# Altium PCB Profiling.PcbDoc
Units mm, origin at the board's own origin, x right, y up, seen from the top; angles counter-clockwise.
Board outline 99.06 x 93.22 mm, 2 copper layers (Top Layer, Bottom Layer); 73 components, 0 nets, 296 pads, 58 vias.
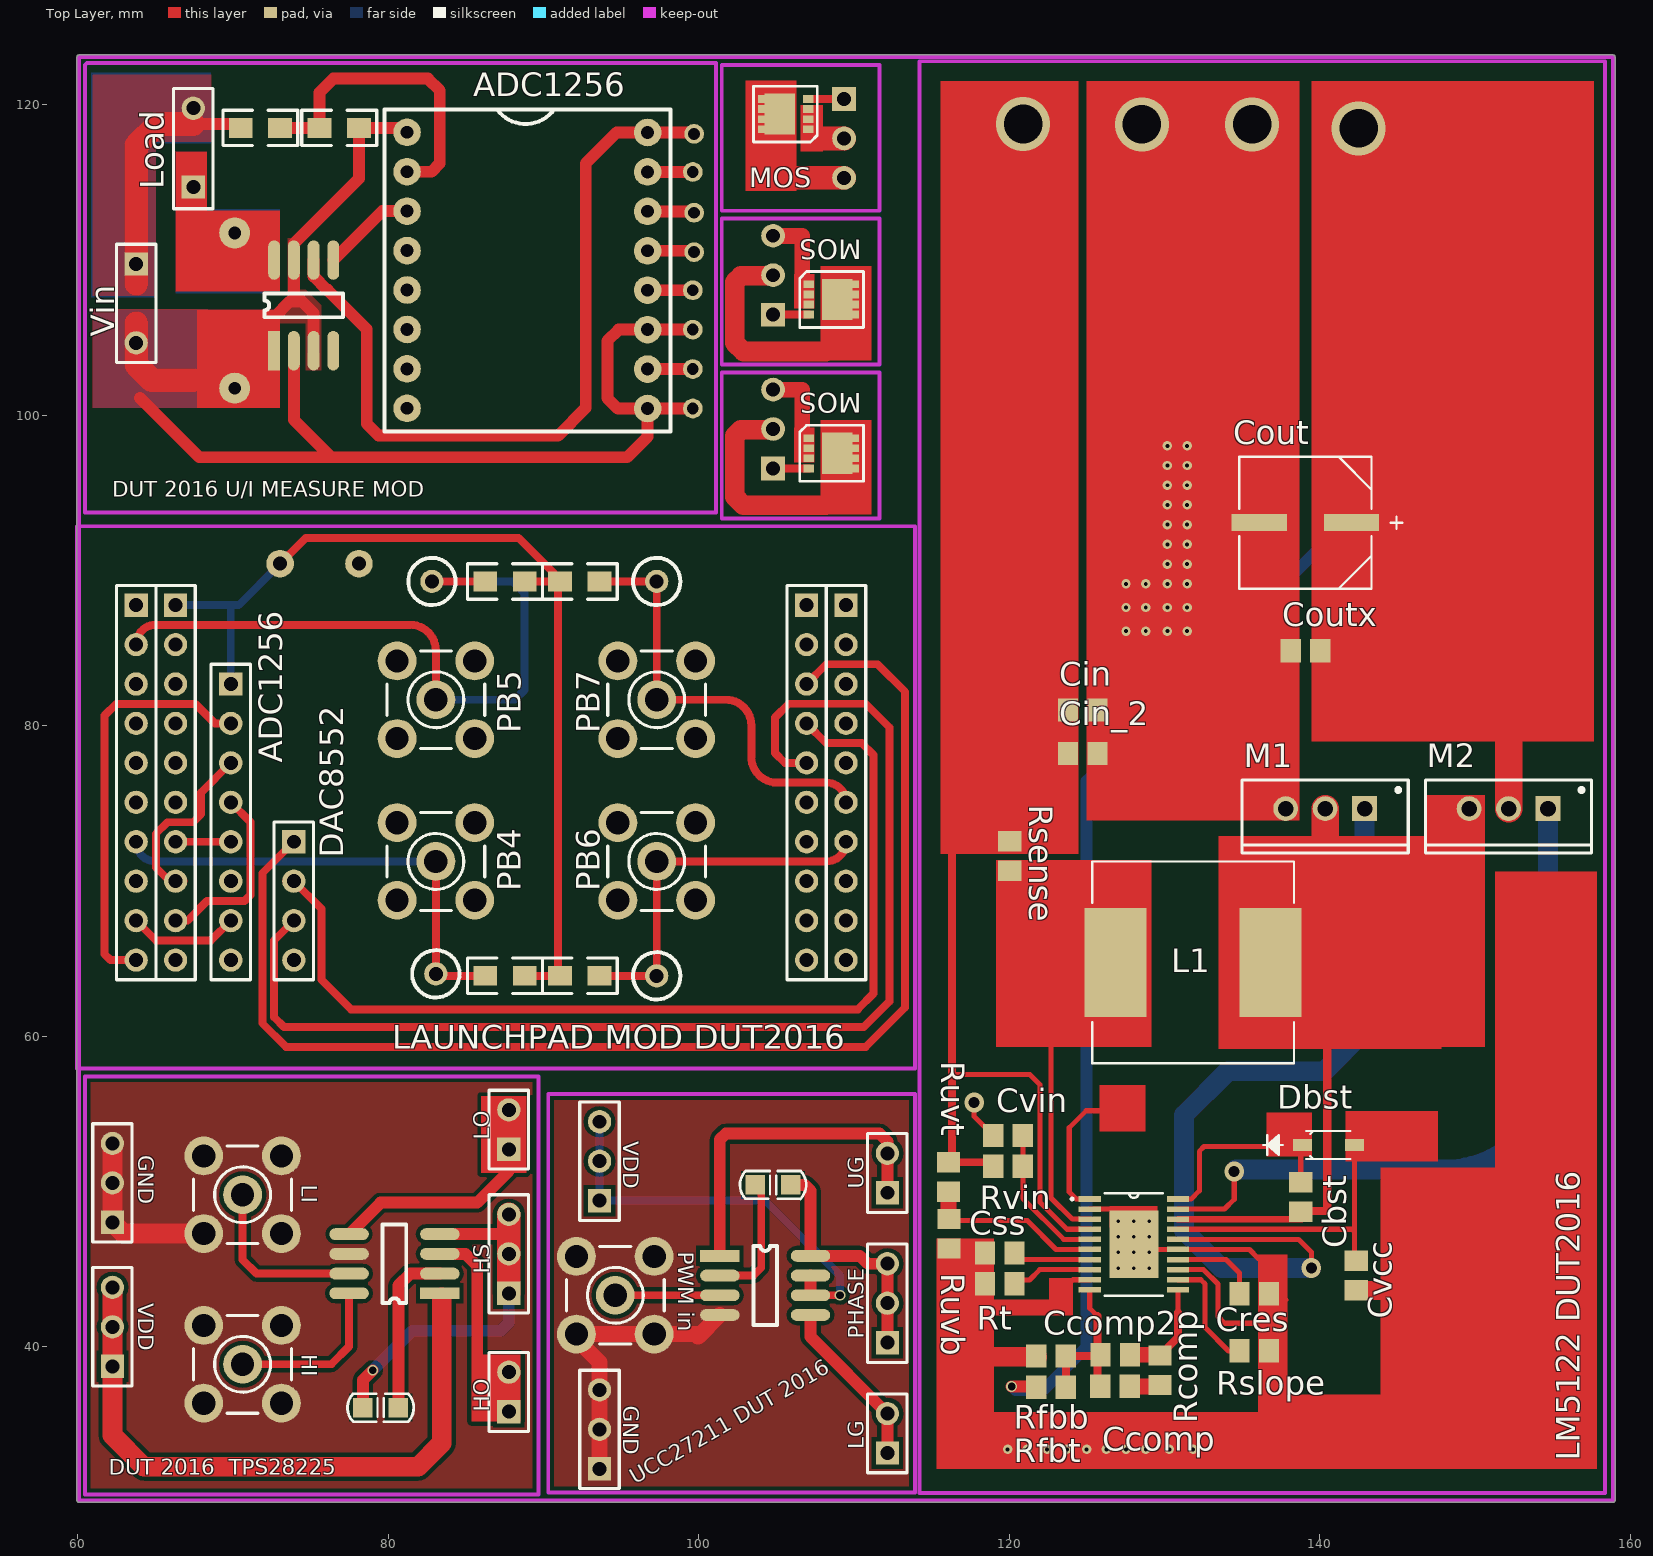
[diagram p0: Top Layer view]
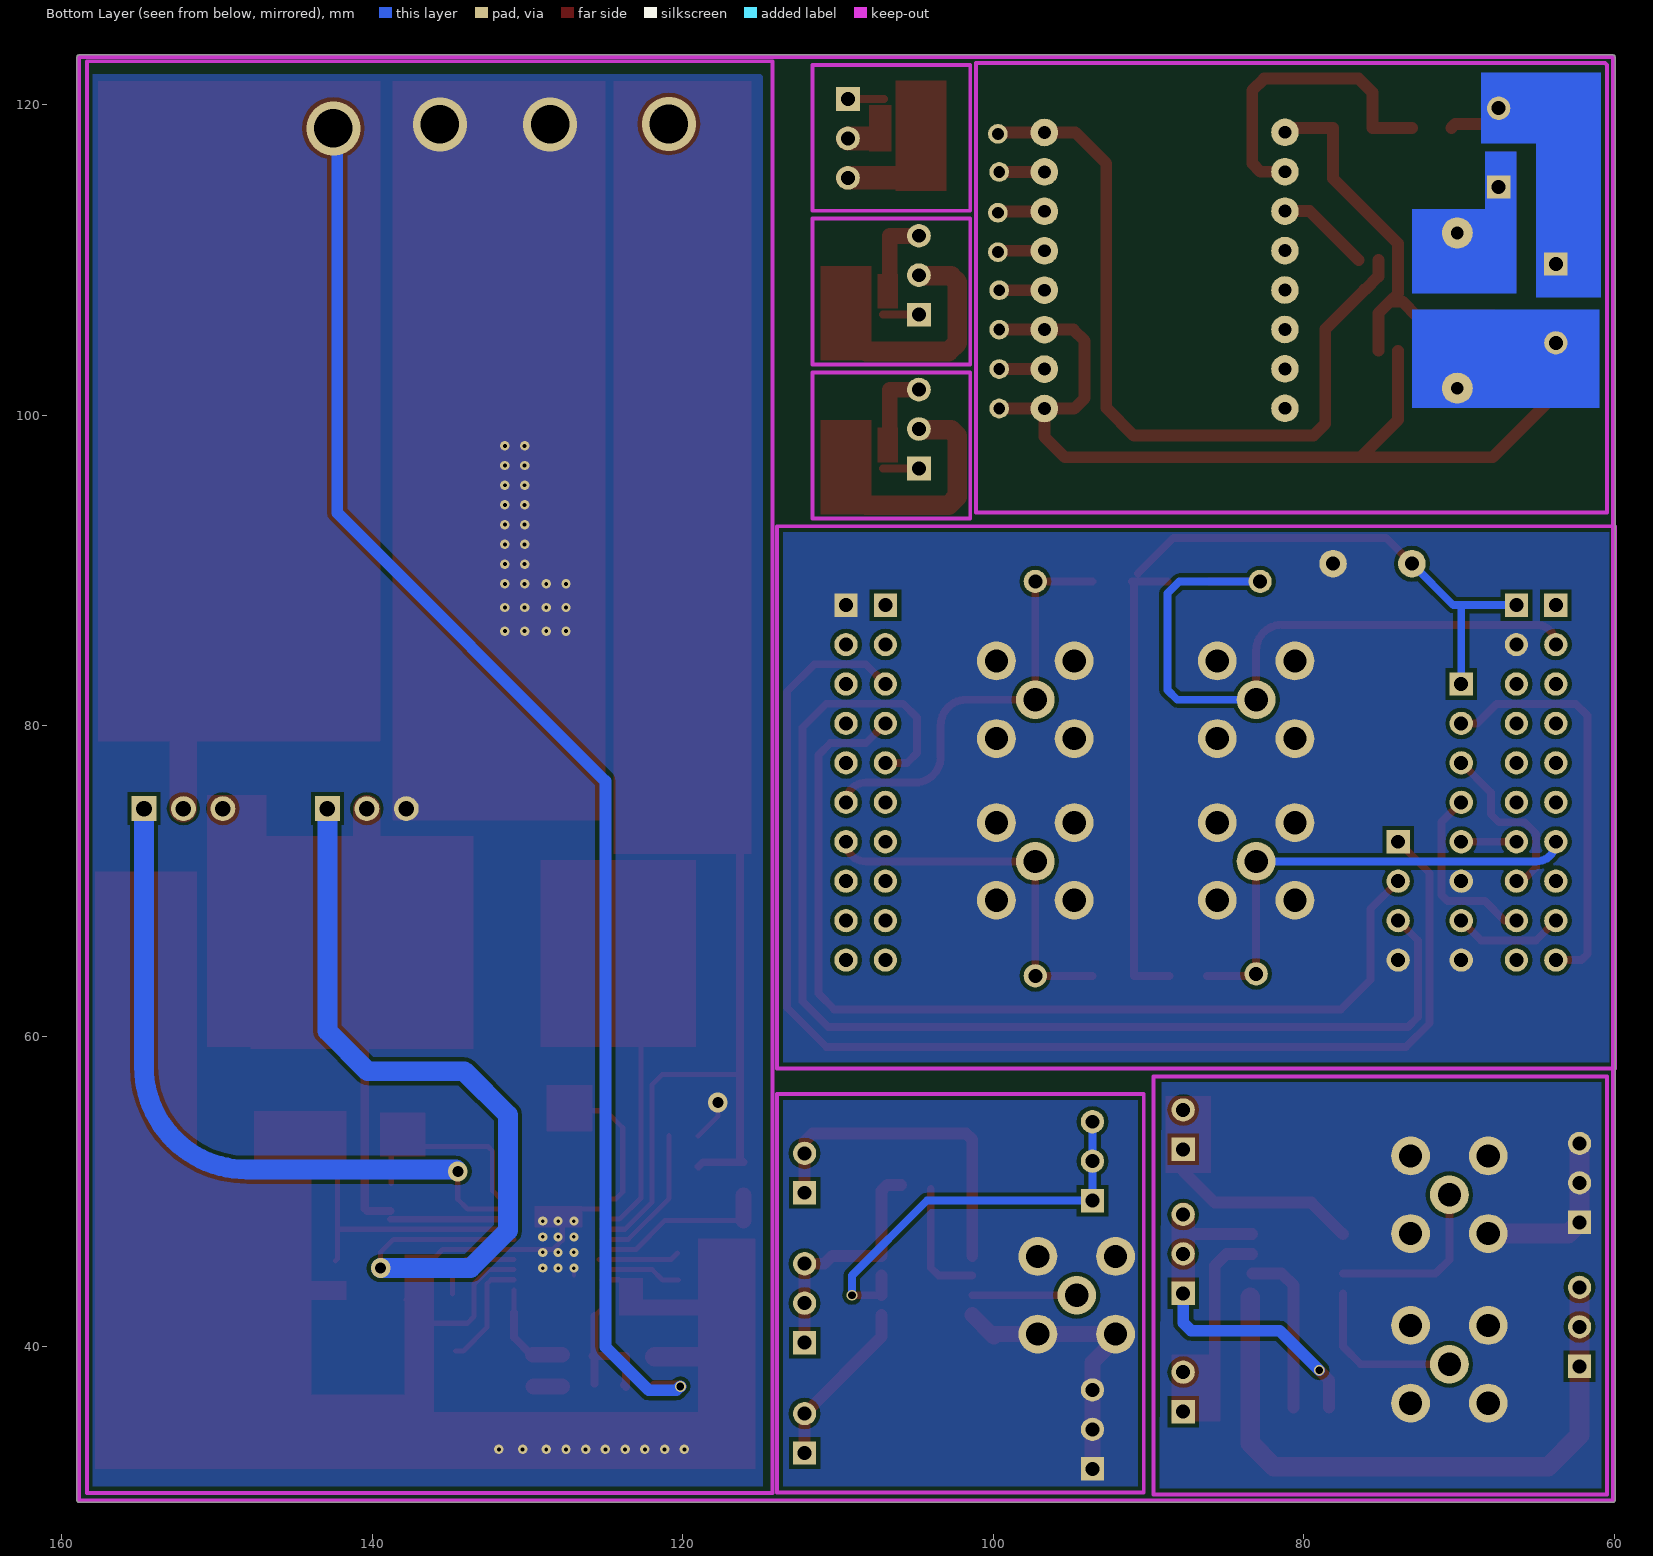
[diagram p1: Bottom Layer view, seen from below]

## Layer stack, top to bottom
Top Solder: solder mask 0.0102, Solder Resist, Dk 3.5
Top Layer: signal copper 0.0356
Dielectric 1: dielectric 0.32, FR-4, Dk 4.8
Bottom Layer: signal copper 0.0356
Bottom Solder: solder mask 0.0102, Solder Resist, Dk 3.5

## Board outline
59.944,30.099 ccw(c60.071,30.099) 60.071,29.972 158.877,29.972 ccw(c158.877,30.099) 159.004,30.099 159.004,123.063 ccw(c158.877,123.063) 158.877,123.19 60.071,123.19 ccw(c60.071,123.063) 59.944,123.063

## Design rules (kind name [scope] priority, off if disabled: settings)
Clearance [All] p1: gap=0.254
PolygonConnect [All] p1: connectstyle=Relief reliefconductorwidth=0.254 reliefentries=4 polygonreliefangle="90 Angle" airgapwidth=0.254
RoutingVias [All] p1: holewidth=0.711 width=1.27 viastyle="Through Hole" minholewidth=0.711 minwidth=1.27 maxholewidth=0.711 maxwidth=1.27
SolderMaskExpansion [All] p1: expansion=0.102
Width [All] p1: maxlimit=100 minlimit=0.254 preferedwidth=0.254 minimp=50.000000 maximp=50.000000 favimp=50.000000
30 further rules are at their usual default settings.

## Components (designator, comment, footprint, x,y, rotation, side; value= is the part's Value field where it differs from the comment)
ADC1256 "ADS1256_Dream" ADS1256_Dream 88.9,109.22 r0 top (schematic designator P1)
C1 "CAP" 0805c 104.775,50.419 r0 top
C1 "CAP" 0805c 79.502,36.068 r180 top
Cbst "Cap" 0805-2 138.76,49.632 r270 top
Ccomp "Cap" 0805-2 126.797,37.44 r180 top
Ccomp2 "Cap" 0805-2 126.822,39.472 r180 top
Cin "Cap" 0805-2 124.714,81.001 r180 top
Cin_2 "Cap" 0805-2 124.714,78.207 r180 top
Cout "35SVPF82M" CAPSMT_62_E12 139.065,93.066 r180 top
Coutx "Cap" 0805-2 139.065,84.811 r0 top
Cres "Cap" 0805-2 135.763,43.409 r180 top
Css "Cap" 0805-2 119.38,46.025 r0 top
Cvcc "Cap" 0805-2 142.342,44.577 r90 top
Cvin "Cap" 0805-2 119.913,53.594 r0 top
Dbst "MBR130T1G" SOD-123 140.538,52.984 r0 top
GND "CON3" HDR1X3 93.599,32.131 r90 top (schematic designator J4)
GND "CON3" HDR1X3 62.23,48.006 r90 top
HI "SMB" SMB_V-RJ45 70.612,38.862 r0 top
HO "CON2" HDR1X2#1 87.757,35.814 r90 top
HS "CON3" HDR1X3 87.757,43.434 r90 top
J1 "CON10" HDR1X10 63.754,87.757 r270 top
J2 "CON10" HDR1X10 66.294,87.757 r270 top
J3 "CON10" HDR1X10 106.934,87.757 r270 top
J4 "CON10" HDR1X10 109.474,87.757 r270 top
J5 "CHECK" CHECK-A 83.058,64.008 r0 top
J5 "CHECK" CHECK-A 97.282,63.881 r0 top
J6 "CHECK" CHECK-A 82.804,89.281 r0 top
J6 "CHECK" CHECK-A 97.282,89.281 r0 top
J9 "CON8" HDR1X8 69.85,82.677 r270 top
J? "CON4" HDR1X4 73.914,72.517 r270 top
L1 "SRR1208-330YL" SRR1208 131.826,64.745 r0 top
LG "CON2" HDR1X2#1 112.141,33.147 r90 top (schematic designator J3)
LI "SMB" SMB_V-RJ45 70.612,49.784 r0 top
LO "CON2" HDR1X2#1 87.757,52.705 r90 top
Load "power" HDR1X2#2 67.437,117.221 r90 top
M1 "NMOS-2" TO-220AB 140.335,74.651 r180 top
M2 "NMOS-2" TO-220AB 152.146,74.651 r180 top
MOS "Comment" TRANS_NexFET_Q3A 108.712,97.536 r0 top (schematic designator M2)
MOS "Comment" TRANS_NexFET_Q3A 108.712,107.442 r0 top (schematic designator M2)
MOS "Comment" TRANS_NexFET_Q3A 105.41,119.38 r180 top (schematic designator M2)
P7 "SMB" SMB_V-RJ45 83.058,71.247 r0 top
P7 "SMB" SMB_V-RJ45 97.282,71.247 r0 top
P8 "SMB" SMB_V-RJ45 83.058,81.661 r0 top
P8 "SMB" SMB_V-RJ45 97.282,81.661 r0 top
PHASE "CON3" HDR1X3 112.141,40.259 r90 top (schematic designator J2)
"PWM in" "SMB" SMB_V-RJ45 94.615,43.307 r0 top (schematic designator P1)
R1 "RES" 0805r 72.898,118.491 r180 top
R1 "RES" 0805r 86.36,63.881 r0 top
R1 "RES" 0805r 93.472,63.881 r180 top
R2 "RES" 0805r 77.978,118.491 r180 top
R2 "RES" 0805r 86.36,89.281 r0 top
R2 "RES" 0805r 93.472,89.281 r180 top
Rcomp "Res1" 0805-2 129.692,38.481 r270 top
Rfbb "Res1" 0805-2 122.682,39.395 r180 top
Rfbt "Res1" 0805-2 122.682,37.389 r0 top
Rsense "RES" AXIAL0.4 70.104,101.727 r90 top
Rsense "Res1" 0805-2 120.015,71.603 r90 top
Rslope "Res1" 0805-2 135.763,39.726 r0 top
Rt "Res1" 0805-2 119.38,44.044 r0 top
Ruvb "Res1" 0805-2 116.103,47.269 r90 top
Ruvt "Res1" 0805-2 116.078,50.927 r90 top
Rvin "Res1" 0805-2 119.913,51.613 r0 top
U1 "INA282" SOIC8 72.644,104.14 r90 top
U1 "TPS28225" SOIC8 101.346,45.847 r0 top
U1 "UCC27211" SOIC8 83.312,43.434 r180 top
U1 "LM5122" MXA20A 128.016,46.584 r0 top
UG "CON2" HDR1X2#1 112.141,49.911 r90 top (schematic designator J1)
VDD "CON3" HDR1X3 93.599,49.403 r90 top (schematic designator J6)
VDD "CON3" HDR1X3 62.23,38.735 r90 top
Vin "power" HDR1X2#3 63.754,109.728 r270 top
? "Comment" TO-220 104.775,96.561 r90 top
? "Comment" TO-220 104.775,106.467 r90 top
? "Comment" TO-220 109.347,120.355 r270 top

## Footprints (in the part's own frame and the unit in brackets; to place one, negate y for a bottom-side part, rotate by r counter-clockwise, add the part's x,y. Pads: shape width x height; smd on the part's side, far side on the other; paste and mask are expansions set on the pad)
0805-2 [mm] "贴片无丝印"
  rect 1.3x1.5 smd: 1(-0.95,0) 2(0.95,0)
0805c [mil]
  rect 50x50 smd: 1(-45,0) 2(45,0)
  silkscreen extent -84,-36 84,36, body extent -46,-23 52,26, height 31
0805r [mil]
  rect 60x50 smd: 1(-5,0) 2(95,0)
  silkscreen extent -50,-45 140,45, body extent -4,-24 94,25, height 31
ADS1256_Dream [mil]
  round 70 hole 32.5: 1(-303,354) 2(-303,254) 3(-303,154) 4(-303,54) 5(-303,-46) 6(-303,-146) 7(-303,-246) 8(-303,-346) 9(307,-346.5) 10(307,-246.5) 11(307,-146.5) 12(307,-46.5) 13(307,53.5) 14(307,153.5) 15(307,253.5) 16(307,353.5)
  silkscreen extent -360,-405 364,412
AXIAL0.4 [mm]
  round 2 hole 0.813: 1(0,0) 2(10,0)
CAPSMT_62_E12 [mil]
  rect 140x43 smd: 1(-117,0) 2(117,0)
  silkscreen extent -246,-168 168,168
CHECK-A [mm] "Connector; Plug"
  round 1.5 hole 0.9: 1(0,0)
  silkscreen extent -1.52,-1.52 1.52,1.52
HDR1X2#1 [mm] "Connector; Header; 2 Position"
  rect 1.5x1.5 hole 0.9: 1(0,0)
  round 1.5 hole 0.9: 2(2.54,0)
  silkscreen extent -1.27,-1.27 3.81,1.27, body extent -1.27,-1.27 3.81,1.27, height 7.58
HDR1X2#2 [mm] "Connector; Header; 2 Position"
  rect 1.5x1.5 hole 0.9: 1(-2.54,0)
  round 1.5 hole 0.9: 2(2.54,0)
  silkscreen extent -3.94,-1.27 3.81,1.27
HDR1X2#3 [mm] "Connector; Header; 2 Position"
  rect 1.5x1.5 hole 0.9: 1(0,0)
  round 1.5 hole 0.9: 2(5.08,0)
  silkscreen extent -1.27,-1.27 6.35,1.27
HDR1X3 [mm] "Connector; Header; 3 Position"
  rect 1.5x1.5 hole 0.9: 1(0,0)
  round 1.5 hole 0.9: 2(2.54,0) 3(5.08,0)
  silkscreen extent -1.27,-1.27 6.35,1.27, body extent -1.27,-1.27 6.35,1.27, height 7.58
HDR1X4 [mm] "Connector; Header; 4 Position"
  rect 1.5x1.5 hole 0.9: 1(0,0)
  round 1.5 hole 0.9: 2(2.54,0) 3(5.08,0) 4(7.62,0)
  silkscreen extent -1.27,-1.27 8.89,1.27, body extent -1.27,-1.27 8.89,1.27, height 7.58
HDR1X8 [mm] "Connector; Header; 8 Position"
  rect 1.5x1.5 hole 0.9: 1(0,0)
  round 1.5 hole 0.9: 2(2.54,0) 3(5.08,0) 4(7.62,0) 5(10.16,0) 6(12.7,0) 7(15.24,0) 8(17.78,0)
  silkscreen extent -1.27,-1.27 19.05,1.27, body extent -1.27,-1.27 19.05,1.27, height 7.58
HDR1X10 [mm] "Connector; Header; 10 Position"
  rect 1.5x1.5 hole 0.9: 1(0,0)
  round 1.5 hole 0.9: 2(2.54,0) 3(5.08,0) 4(7.62,0) 5(10.16,0) 6(12.7,0) 7(15.24,0) 8(17.78,0) 9(20.32,0) 10(22.86,0)
  silkscreen extent -1.27,-1.27 24.13,1.27, body extent -1.27,-1.27 24.13,1.27, height 7.58
MXA20A [mil]
  rect 56x14 smd: 1(-112,115.16) 2(-112,89.57) 3(-112,63.98) 4(-112,38.39) 5(-112,12.8) 6(-112,-12.8) 7(-112,-38.39) 8(-112,-63.98) 9(-112,-89.57) 10(-112,-115.16) 11(112,-115.16) 12(112,-89.57) 13(112,-63.98) 14(112,-38.39) 15(112,-12.8) 16(112,12.8) 17(112,38.39) 18(112,63.98) 19(112,89.57) 20(112,115.16)
  rect 124x171 smd: 21(0,0)
  silkscreen extent -160,-130 74,130
SMB_V-RJ45 [mm] "Connector; SMB Straight"
  round 2.5 hole 1.5: 1(0,0) 2(-2.5,-2.5) 2(-2.5,2.5) 2(2.5,-2.5) 2(2.5,2.5)
  silkscreen extent -3.15,-3.15 3.15,3.15
SOD-123 [mil]
  rect 48x30 smd: 1(-66,0) 2(66,0)
  silkscreen extent -165,-36 56,36
SOIC8 [mil]
  rect 100x30 smd: 1(0,0)
  oval 100x30 smd: 2(0,-50) 3(0,-100) 4(0,-150) 5(230,-150) 6(230,-100) 7(230,-50) 8(230,0)
  silkscreen extent 85,-175 145,25, body extent 1,-171 237,21, height 69
SRR1208 [mil]
  rect 157x276 smd: 1(-196.5,0) 2(196.5,0)
  silkscreen extent -256,-256 256,256
TO-220 [mil]
  rect 60x60 hole 35: 1(0,0)
  round 60 hole 35: 2(100,0) 3(200,0)
TO-220AB [mm] "TO, Thru-Hole, Vertical, Heatsink Mounted; 3 In-Line Leads; Pitch 2.54 mm"
  rect 1.6x1.6 hole 1: 1(-2.54,0)
  round 1.6 hole 1: 2(0,0) 3(2.54,0)
  silkscreen extent -5.35,-1.85 5.35,2.85, body extent -5.4,-1.9 5.4,2.9, height 19.3
TRANS_NexFET_Q3A [mm]
  rect 0.68x0.5 smd: 1(-1.625,0.975) 2(-1.625,0.325) 3(-1.625,-0.325) 4(-1.625,-0.975)
  rect 0.41x0.5 smd: 5(1.385,-0.975) 6(1.385,-0.325) 7(1.385,0.325) 8(1.385,0.975)
  rect 1.96x2.65 smd: 9(0.205,0)
  silkscreen extent -2.21,-1.8 1.9,1.8

## Part data
ADC1256: library part ADS1256
Cbst Ccomp Ccomp2 Cin Cin_2 Coutx Cres Css Cvcc Cvin: "无极性电容"
HI LI P7 P7 P8 P8 "PWM in": "SMB Straight Connector"
J5 J5 J6 J6: "测试点"
M1 M2: "N-Channel Power MOSFET"
Rcomp Rfbb Rfbt Rsense Rslope Rt Ruvb Ruvt Rvin: "贴片电阻"
U1 U1 U1 U1: library part Component_1

## Free pads (board coordinates)
  round 1.778 hole 0.9: 2(73.025,90.424) 3(78.105,90.424)
  round 1.27 hole 0.762: 4(99.695,118.11) 5(99.606,115.659) 6(99.695,113.03) 7(99.695,110.49) 8(99.606,108.039) 9(99.606,105.499) 10(99.606,102.959) 11(99.606,100.419)

## Via types
v1: diameter 0.61/0.61 (per signal layer), hole 0.254, Top Layer to Bottom Layer, 36 vias
v2: diameter 0.584/0.584 (per signal layer), hole 0.229, Top Layer to Bottom Layer, 12 vias
v3: diameter 3.48/3.48 (per signal layer), hole 2.489, Top Layer to Bottom Layer, 4 vias
v4: diameter 0.7, hole 0.5, Top Layer to Bottom Layer, 3 vias
v5: diameter 1.27, hole 0.711, Top Layer to Bottom Layer, 3 vias

## Nets (pads, with @x,y where several pads share a name; then routed paths per layer and width w, separated by ;. In a path a pad name is that pad's centre, name@x,y a point inside that pad or via, vN(x,y) a via of type N, cw(c..) or ccw(c..) an arc to the next point about the centre after c; other vN are vias at no path point)
pads on no net: "PWM in.1" "PWM in.2" ?.1 ?.2 ?.3 ADC1256.1 ADC1256.2 ADC1256.3 ADC1256.4 ADC1256.5 ADC1256.6 ADC1256.7 ADC1256.8 ADC1256.9 ADC1256.10 ADC1256.11 ADC1256.12 ADC1256.13 ADC1256.14 ADC1256.15 ADC1256.16 C1.1 C1.2 Cbst.1 Cbst.2 Ccomp2.1 Ccomp2.2 Ccomp.1 Ccomp.2 Cin.1 Cin.2 Cin_2.1 Cin_2.2 Cout.1 Cout.2 Coutx.1 Coutx.2 Cres.1 Cres.2 Css.1 Css.2 Cvcc.1 Cvcc.2 Cvin.1 Cvin.2 Dbst.1 Dbst.2 GND.1 GND.2 GND.3 HI.1 HI.2 HO.1 HO.2 HS.1 HS.2 HS.3 J1.1 J1.2 J1.3 J1.4 J1.5 J1.6 J1.7 J1.8 J1.9 J1.10 J2.1 J2.2 J2.3 J2.4 J2.5 J2.6 J2.7 J2.8 J2.9 J2.10 J3.1 J3.2 J3.3 J3.4 J3.5 J3.6 J3.7 J3.8 J3.9 J3.10 J4.1 J4.2 J4.3 J4.4 J4.5 J4.6 J4.7 J4.8 J4.9 J4.10 J5.1 J6.1 J9.1 J9.2 J9.3 J9.4 J9.5 J9.6 J9.7 J9.8 J?.1 J?.2 J?.3 J?.4 L1.1 L1.2 LG.1 LG.2 LI.1 LI.2 LO.1 LO.2 Load.1 Load.2 M1.1 M1.2 M1.3 M2.1 M2.2 M2.3 MOS.1 MOS.2 MOS.3 MOS.4 MOS.5 MOS.6 MOS.7 MOS.8 MOS.9 P7.1 P7.2 P8.1 P8.2 PHASE.1 PHASE.2 PHASE.3 R1.1 R1.2 R2.1 R2.2 Rcomp.1 Rcomp.2 Rfbb.1 Rfbb.2 Rfbt.1 Rfbt.2 Rsense.1 Rsense.2 Rslope.1 Rslope.2 Rt.1 Rt.2 Ruvb.1 Ruvb.2 Ruvt.1 Ruvt.2 Rvin.1 Rvin.2 U1.1 U1.2 U1.3 U1.4 U1.5 U1.6 U1.7 U1.8 U1.9 U1.10 U1.11 U1.12 U1.13 U1.14 U1.15 U1.16 U1.17 U1.18 U1.19 U1.20 U1.21 UG.1 UG.2 VDD.1 VDD.2 VDD.3 Vin.1 Vin.2
copper on no net: | length 1421.4
  Top Layer w0.254: 127,44.577 v2(127,45.06)
  Top Layer w0.33: 116.078,48.12 121.145,48.12 123.007,46.259 125.171,46.259 ; 116.307,57.531 121.31,57.531 121.971,56.871 121.971,49.301 123.714,47.559 125.171,47.559 ; v5(117.729,55.728) 117.729,54.826 118.986,53.569 ; 118.491,42.647 118.618,42.647 118.745,42.52 122.301,42.52 124.09,44.309 125.171,44.309 ; 120.282,44.298 121.285,44.298 121.946,44.959 125.171,44.959 ; 120.33,46.025 120.746,45.609 125.374,45.609 ; 120.863,53.594 120.863,51.613 120.863,49.545 123.5,46.909 125.171,46.909 ; 123.444,60.935 122.682,60.173 122.682,49.581 124.054,48.209 125.171,48.209 ; 125.171,43.659 125.171,42.469 125.679,41.961 ; 125.171,48.859 127.751,48.859 127.751,46.849 128.341,46.259 130.861,46.259 135.453,46.259 136.017,45.695 ; 125.171,49.509 124.304,49.509 123.85,49.962 123.85,54.102 124.943,55.194 126.086,55.194 ; 130.861,42.189 130.861,43.659 ; 130.861,44.309 132.323,44.309 132.588,44.044 132.588,41.25 134.112,39.726 134.607,39.726 ; 130.861,44.959 132.499,44.959 133.426,44.032 133.426,41.935 133.858,41.504 136.017,41.504 136.271,41.758 ; 130.861,45.609 133.944,45.609 134.813,44.74 134.813,43.409 ; 130.861,46.909 138.613,46.909 139.446,46.076 v5(139.446,45.06) ; 130.861,47.559 142.052,47.559 142.138,47.473 ; 130.861,48.859 133.847,48.859 134.477,49.489 v5(134.477,51.283) ; 130.861,49.509 131.703,49.509 132.232,50.038 132.232,52.578 132.537,52.883 138.76,52.883 138.76,50.505 ; 137.414,43.409 137.808,43.015 ; 140.322,48.73 140.462,48.87 ; 140.462,60.808 141.097,61.443 ; 142.215,52.984 142.215,45.654 142.342,45.527
  Top Layer w0.356: v2(129.007,46.076) v2@129.184,46.253
  Top Layer w0.43: 130.861,48.209 138.811,48.209
  Top Layer w0.508: 63.754,64.897 62.103,64.897 61.722,65.278 61.722,80.645 62.472,81.395 67.576,81.395 68.834,80.137 69.85,80.137 ; 63.754,67.437 65.024,66.167 68.58,66.167 69.85,67.437 ; 63.754,85.217 cw(c65.024,85.217) 65.024,86.487 81.402,86.487 ; 66.294,67.437 67.056,67.437 68.326,68.707 70.739,68.707 71.12,69.088 71.12,73.787 69.85,75.057 ; 66.294,72.517 69.85,72.517 ; 66.802,69.977 66.294,69.977 65.913,69.977 65.024,70.866 65.024,73.026 65.773,73.775 67.425,73.775 67.945,74.295 67.945,75.692 69.85,77.597 ; 70.612,38.862 76.327,38.862 77.47,40.005 77.47,43.434 ; 70.612,49.784 70.612,45.593 71.501,44.704 77.47,44.704 ; 73.025,90.424 74.676,92.075 88.392,92.075 90.678,89.789 ; 73.406,69.977 73.533,69.85 ; 73.914,67.437 72.644,66.167 72.644,61.214 73.279,60.579 110.617,60.579 112.268,62.23 112.268,79.883 110.744,81.407 105.791,81.407 104.902,80.518 104.902,78.232 105.537,77.597 106.934,77.597 ; 73.914,69.977 75.692,68.199 75.692,63.627 77.597,61.722 110.236,61.722 111.252,62.738 111.252,78.105 110.49,78.867 108.204,78.867 106.934,80.137 ; 73.914,72.517 71.882,70.485 71.882,60.833 73.406,59.309 110.744,59.309 113.284,61.849 113.284,82.169 111.506,83.947 108.204,83.947 106.934,82.677 ; 81.402,86.492 cw(c81.402,84.836) 83.058,84.836 83.058,81.661 ; 82.804,89.281 86.106,89.281 ; 83.058,71.247 83.058,64.008 83.185,63.881 86.233,63.881 ; 88.646,63.881 90.932,63.881 90.932,89.281 ; 88.773,89.281 90.932,89.281 ; 91.059,89.281 90.932,89.281 ; 93.599,63.881 97.282,63.881 97.282,71.247 108.204,71.247 ccw(c108.204,72.517) 109.474,72.517 ; 93.599,89.281 97.282,89.281 97.282,81.661 101.727,81.661 ; 94.615,43.307 101.346,43.307 ; 101.346,44.577 103.505,44.577 104.013,45.085 104.013,50.165 ; 101.722,81.666 cw(c101.722,80.01) 103.378,80.01 103.378,77.988 ; 103.373,77.983 ccw(c105.029,77.983) 105.029,76.327 108.204,76.327 cw(c108.204,75.057) 109.474,75.057 ; 104.267,96.647 104.353,96.561 107.087,96.561 ; 104.267,106.553 104.353,106.467 107.087,106.467 ; 107.035,120.355 109.769,120.355 109.855,120.269 ; 107.188,43.307 v4@108.839,43.307 ; 116.307,72.441 116.307,57.531 116.307,52.106 116.078,51.877 118.699,51.877 118.963,51.613 ; 123.774,37.531 123.632,37.389 123.632,39.395 125.679,39.395 ; 125.679,37.607 125.679,39.395 ; 125.679,41.961 125.679,39.395 ; 125.796,39.395 125.679,39.395 ; 129.601,37.44 129.692,37.531 ; 129.692,39.431 130.861,40.599 130.861,42.189
  Top Layer w0.53: 138.811,48.73 140.322,48.73 ; 140.462,48.87 140.462,60.808
  Top Layer w0.762: 64.008,101.092 67.818,97.282 76.327,97.282 ; 67.437,102.235 72.39,102.235 72.644,102.489 72.644,104.14 ; 67.437,112.235 72.042,112.235 72.644,111.633 72.644,109.982 ; 67.437,118.745 70.231,118.745 70.485,118.491 ; 72.644,106.299 73.66,107.315 74.422,107.315 ; 73.025,118.491 75.565,118.491 75.565,120.777 76.454,121.666 82.55,121.666 83.312,120.904 83.312,116.205 82.779,115.672 81.204,115.672 ; 73.914,104.14 73.914,99.695 76.327,97.282 ; 75.184,104.14 75.184,106.553 74.422,107.315 ; 75.184,109.982 75.184,108.926 76.033,108.077 76.073,108.077 78.613,105.537 78.613,99.441 79.375,98.679 90.932,98.679 92.71,100.457 92.71,116.205 94.704,118.199 96.698,118.199 99.606,118.199 ; 76.454,109.982 79.604,113.132 81.204,113.132 ; 77.47,47.244 79.502,49.276 85.725,49.276 87.757,51.308 87.757,52.705 87.757,55.245 ; 78.359,36.068 78.359,37.846 v4(78.994,38.481) ; 80.645,36.068 80.645,43.942 81.407,44.704 83.312,44.704 ; 81.204,118.212 80.924,118.491 78.105,118.491 78.105,115.229 73.914,111.038 73.914,109.982 73.914,107.823 74.422,107.315 ; 83.312,45.974 84.963,45.974 85.725,45.212 85.725,39.116 86.487,38.354 87.757,38.354 87.757,35.814 ; 83.312,47.244 87.63,47.244 ; 96.698,102.959 99.606,102.959 ; 96.698,108.039 99.606,108.039 ; 96.698,110.579 99.606,110.579 ; 96.698,113.119 99.606,113.119 ; 96.698,115.659 99.606,115.659 ; 99.606,100.419 96.698,100.419 ; 99.606,105.499 96.698,105.499 94.831,105.499 94.107,104.775 94.107,101.092 94.78,100.419 96.698,100.419 ; 101.346,45.847 101.346,53.34 101.727,53.721 111.633,53.721 112.141,53.213 112.141,52.451 112.141,49.911 ; 105.918,50.419 106.807,50.419 107.188,50.038 107.188,45.847 110.363,45.847 110.871,45.339 112.141,45.339 112.141,42.799 112.141,40.259 ; 107.188,42.037 107.188,40.64 112.141,35.687 112.141,33.147 ; 107.188,43.307 107.188,44.577 ; v4(120.142,37.44) 121.78,37.44 ; 76.327,97.282 95.377,97.282 96.698,98.603 96.698,100.419
  Top Layer w1.016: 93.599,32.131 93.599,34.671 93.599,37.211 93.599,38.989 92.115,40.473 92.115,40.807 97.115,40.807 99.782,40.807 99.949,40.64 101.346,42.037 ; 104.775,101.625 106.655,101.625 106.655,98.943 ; 104.775,111.531 106.655,111.531 106.655,108.849 ; 116.078,48.12 116.078,49.746 ; 127.747,37.44 129.601,37.44 ; 127.772,39.472 129.652,39.472
  Top Layer w1.27: 62.23,43.815 62.23,41.275 62.23,38.735 62.23,34.29 64.262,32.258 81.915,32.258 83.439,33.782 83.439,43.18 ; 62.23,53.086 62.23,50.546 62.23,48.006 62.952,47.284 68.112,47.284 ; 104.775,99.06 102.718,99.06 102.311,98.654 102.311,94.742 102.87,94.183 108.179,94.183 108.814,94.818 108.814,96.672 ; 104.775,108.966 102.718,108.966 102.311,108.56 102.311,104.648 102.87,104.089 108.179,104.089 108.814,104.724 108.814,106.578 ; 118.364,39.599 118.618,39.345 121.78,39.345
  Top Layer w1.524: 63.754,105.918 63.754,103.251 64.77,102.235 67.437,102.235 ; 63.754,108.458 63.754,117.348 65.151,118.745 67.437,118.745 ; 67.437,112.235 67.437,116.205 ; 87.757,43.434 87.757,45.974 87.757,48.514 ; 104.775,119.253 104.775,115.697 105.197,115.275 109.347,115.275 ; 107.737,117.815 109.347,117.815
  Top Layer w1.778: 140.335,70.333 140.335,74.651 ; 152.146,74.651 152.146,79.477 152.273,79.604
  Bottom Layer w0.508: 63.754,72.517 ccw(c65.024,72.517) 65.024,71.247 83.058,71.247 ; 66.294,87.757 69.85,87.757 ; 69.85,82.677 69.85,87.757 ; 73.025,90.424 70.358,87.757 69.85,87.757 ; 82.804,89.281 88.011,89.281 88.773,88.519 88.773,82.296 88.138,81.661 83.058,81.661 ; 93.599,54.483 93.599,51.943 93.599,49.403 104.267,49.403 109.093,44.577 v4(109.093,43.307)
  Bottom Layer w0.762: v4(78.994,38.481) 81.534,41.021 87.249,41.021 87.757,41.529 87.757,43.434 ; v4(120.142,37.44) 120.396,37.186 122.174,37.186 124.968,39.98 124.968,76.429 142.24,93.701 v3@142.24,118.212 ; v5(134.477,51.283) v5@134.597,51.403
  Bottom Layer w1.27: v5@134.597,51.403 148.071,51.403 ccw(c148.071,58.019) 154.687,58.019 ; v5(139.446,45.06) 133.655,45.06 131.242,47.473 131.242,54.915 134.061,57.734 140.284,57.734 142.875,60.325 142.875,74.651 ; 154.686,58.268 154.686,74.651
  other v1: 119.888,33.376 121.158,33.376 122.428,33.376 123.698,33.376 124.968,33.376 126.238,33.376 127.508,33.376 128.778,33.376 130.302,33.376 131.826,33.376 127.508,86.081 128.778,86.081 130.175,86.081 131.445,86.081 127.508,87.605 128.778,87.605 130.175,87.605 131.445,87.605 127.508,89.129 128.778,89.129 130.175,89.129 131.445,89.129 130.175,90.399 131.445,90.399 130.175,91.669 131.445,91.669 130.175,92.939 131.445,92.939 130.175,94.209 131.445,94.209 130.175,95.479 131.445,95.479 130.175,96.749 131.445,96.749 130.175,98.019 131.445,98.019
  other v2: 128.016,45.06 129.007,45.06 127,46.076 128.016,46.076 127,47.066 128.016,47.066 129.007,47.066 127,48.082 128.016,48.082 129.007,48.082
  other v3: 142.494,118.466 128.524,118.72 135.636,118.72 120.879,118.745

## Polygon pours and split planes (outlines as drawn)
no net on Top Layer "Top Layer-No Net" (solid, pour order 8): 68.326,104.267 68.326,100.457 60.96,100.457 60.96,106.807 68.326,106.807
no net on Top Layer "Top Layer-No Net" (solid, pour order 6): 65.024,107.696 60.96,107.696 60.96,121.92 68.58,121.92 68.58,117.602 65.024,117.602
no net on Top Layer "Top Layer-No Net" (solid, pour order 4): 75.692,102.87 74.676,102.87 74.676,105.918 72.771,105.918 72.771,106.68 72.644,106.807 73.406,106.807 73.533,106.807 73.533,111.379 74.295,111.379 74.295,108.077 74.676,108.077 75.692,107.061
no net on Top Layer "Top Layer-No Net" (solid, pour order 10): 90.297,30.607 90.297,56.261 113.919,56.261 113.919,30.607
no net on Top Layer "Top Layer-No Net" (solid, pour order 0): 89.535,30.607 60.579,30.607 60.579,57.277 89.535,57.277
no net on Bottom Layer "Top Layer-No Net" (solid, pour order 12): 90.551,56.007 90.551,30.861 113.665,30.861 113.665,56.007
no net on Bottom Layer "Top Layer-No Net" (solid, pour order 2): 89.281,30.861 60.96,30.861 60.833,30.861 60.833,57.023 89.154,57.023
no net on Bottom Layer "MidLayer1-No Net" (solid, pour order 18): 158.09,31.013 114.833,31.013 114.833,121.818 114.96,121.945 158.09,121.945
no net on Bottom Layer "MidLayer1-No Net" (solid, pour order 20): 59.944,57.912 59.944,92.837 113.919,92.837 113.919,57.912
no net on Top Paste "Top Layer-No Net" (solid, remove dead copper): 109.507,96.391 109.507,97.411 108.057,97.411 108.057,96.391
no net on Top Paste "Top Layer-No Net" (solid, remove dead copper): 109.507,97.661 109.507,98.681 108.057,98.681 108.057,97.661
no net on Top Paste "Top Layer-No Net" (solid, remove dead copper): 109.737,98.341 110.187,98.341 110.187,98.681 109.737,98.681
no net on Top Paste "Top Layer-No Net" (solid, remove dead copper): 109.737,97.691 110.187,97.691 110.187,98.031 109.737,98.031
no net on Top Paste "Top Layer-No Net" (solid, remove dead copper): 109.737,97.041 110.187,97.041 110.187,97.381 109.737,97.381
no net on Top Paste "Top Layer-No Net" (solid, remove dead copper): 109.737,96.391 110.187,96.391 110.187,96.731 109.737,96.731
no net on Top Paste "Top Layer-No Net" (solid, remove dead copper): 106.862,96.391 107.312,96.391 107.312,96.731 106.862,96.731
no net on Top Paste "Top Layer-No Net" (solid, remove dead copper): 106.872,97.041 107.322,97.041 107.322,97.381 106.872,97.381
no net on Top Paste "Top Layer-No Net" (solid, remove dead copper): 106.862,97.691 107.312,97.691 107.312,98.031 106.862,98.031
no net on Top Paste "Top Layer-No Net" (solid, remove dead copper): 106.862,98.341 107.312,98.341 107.312,98.681 106.862,98.681
no net on Top Paste "Top Layer-No Net" (solid, remove dead copper): 106.862,108.247 107.312,108.247 107.312,108.587 106.862,108.587
no net on Top Paste "Top Layer-No Net" (solid, remove dead copper): 106.862,107.597 107.312,107.597 107.312,107.937 106.862,107.937
no net on Top Paste "Top Layer-No Net" (solid, remove dead copper): 106.872,106.947 107.322,106.947 107.322,107.287 106.872,107.287
no net on Top Paste "Top Layer-No Net" (solid, remove dead copper): 106.862,106.297 107.312,106.297 107.312,106.637 106.862,106.637
no net on Top Paste "Top Layer-No Net" (solid, remove dead copper): 109.737,106.297 110.187,106.297 110.187,106.637 109.737,106.637
no net on Top Paste "Top Layer-No Net" (solid, remove dead copper): 109.737,106.947 110.187,106.947 110.187,107.287 109.737,107.287
no net on Top Paste "Top Layer-No Net" (solid, remove dead copper): 109.737,107.597 110.187,107.597 110.187,107.937 109.737,107.937
no net on Top Paste "Top Layer-No Net" (solid, remove dead copper): 109.737,108.247 110.187,108.247 110.187,108.587 109.737,108.587
no net on Top Paste "Top Layer-No Net" (solid, remove dead copper): 109.507,107.567 109.507,108.587 108.057,108.587 108.057,107.567
no net on Top Paste "Top Layer-No Net" (solid, remove dead copper): 109.507,106.297 109.507,107.317 108.057,107.317 108.057,106.297
no net on Top Paste "Top Layer-No Net" (solid, remove dead copper): 107.26,118.575 106.81,118.575 106.81,118.235 107.26,118.235
no net on Top Paste "Top Layer-No Net" (solid, remove dead copper): 107.26,119.225 106.81,119.225 106.81,118.885 107.26,118.885
no net on Top Paste "Top Layer-No Net" (solid, remove dead copper): 107.25,119.875 106.8,119.875 106.8,119.535 107.25,119.535
no net on Top Paste "Top Layer-No Net" (solid, remove dead copper): 107.26,120.525 106.81,120.525 106.81,120.185 107.26,120.185
no net on Top Paste "Top Layer-No Net" (solid, remove dead copper): 104.385,120.525 103.935,120.525 103.935,120.185 104.385,120.185
no net on Top Paste "Top Layer-No Net" (solid, remove dead copper): 104.385,119.875 103.935,119.875 103.935,119.535 104.385,119.535
no net on Top Paste "Top Layer-No Net" (solid, remove dead copper): 104.385,119.225 103.935,119.225 103.935,118.885 104.385,118.885
no net on Top Paste "Top Layer-No Net" (solid, remove dead copper): 104.385,118.575 103.935,118.575 103.935,118.235 104.385,118.235
no net on Top Paste "Top Layer-No Net" (solid, remove dead copper): 104.615,119.255 104.615,118.235 106.065,118.235 106.065,119.255
no net on Top Paste "Top Layer-No Net" (solid, remove dead copper): 104.615,120.525 104.615,119.505 106.065,119.505 106.065,120.525

## Keep-outs
Keep-Out Layer:
  lines w0.254: 59.944,57.912 113.919,57.912 113.919,92.837 59.944,92.837 59.944,57.912 ; 60.071,30.099 158.877,30.099 158.877,123.063 60.071,123.063 60.071,30.099 ; 60.452,30.48 60.452,56.896 60.452,57.404 89.662,57.404 89.662,30.48 60.452,30.48 ; 60.452,93.726 101.092,93.726 101.092,122.682 60.579,122.682 60.452,122.555 60.452,93.726 ; 90.297,30.607 90.297,56.261 113.919,56.261 113.919,30.607 90.297,30.607 ; 101.473,93.345 101.473,102.743 111.633,102.743 111.633,93.345 101.473,93.345 ; 101.473,103.251 111.633,103.251 111.633,112.649 101.473,112.649 101.473,103.251 ; 101.473,113.157 101.473,122.555 111.633,122.555 111.633,113.157 101.473,113.157 ; 114.198,30.582 158.369,30.582 158.369,122.784 114.198,122.784 114.198,30.582

## Other copper
Top Layer:
  region: 111.125,93.599 111.125,99.695 107.823,99.695 107.823,93.599
  region: 111.074,96.241 111.074,98.755 109.677,98.755 109.677,96.241
  region: 107.442,96.952 107.442,99.187 106.121,99.187 106.121,96.952
  region: 107.442,96.952 107.442,98.755 106.731,98.755 106.731,96.952
  region: 68.326,107.95 68.326,116.967 66.294,116.967 66.294,107.95
  region: 73.025,107.95 73.025,113.157 67.945,113.157 67.945,107.95
  region: 73.025,100.457 73.025,106.807 67.691,106.807 67.691,100.457
  region: 107.442,106.858 107.442,108.661 106.731,108.661 106.731,106.858
  region: 107.442,106.858 107.442,109.093 106.121,109.093 106.121,106.858
  region: 111.074,106.147 111.074,108.661 109.677,108.661 109.677,106.147
  region: 103.048,120.675 103.048,118.161 104.445,118.161 104.445,120.675
  region: 106.553,119.964 106.553,116.967 108.001,116.967 108.001,119.964
  region: 106.68,119.964 106.68,118.161 107.391,118.161 107.391,119.964
  region: 106.299,114.427 106.299,121.539 102.997,121.539 102.997,114.427
  region: 111.125,103.505 111.125,109.601 107.823,109.601 107.823,103.505
  rectangle: 85.344,35.179 88.519,39.497
  rectangle: 85.979,51.181 88.9,56.134
  rectangle: 125.806,53.848 128.778,56.845
  rectangle: 126.441,47.676 129.54,49.073
  rectangle: 146.812,59.284 150.622,75.54
  rectangle: 136.017,32.106 137.922,45.949
  rectangle: 116.459,32.106 137.668,35.789
  rectangle: 115.316,32.106 118.999,46.965
  rectangle: 139.446,78.969 157.658,121.514
  rectangle: 133.477,59.157 147.828,72.873
  rectangle: 124.968,73.889 138.684,121.514
  rectangle: 119.126,59.284 129.159,71.349
  rectangle: 115.57,71.73 124.46,121.514
  rectangle: 118.491,42.012 122.555,43.028
  rectangle: 122.555,42.012 124.079,44.425
  rectangle: 151.257,32.106 157.836,70.587
  rectangle: 136.525,32.106 157.709,36.932
  rectangle: 143.891,32.106 157.785,51.537
  rectangle: 141.63,43.002 145.847,44.221
  rectangle: 141.63,51.918 147.599,55.169
  rectangle: 136.55,52.248 139.471,55.093
Bottom Layer:
  rectangle: 66.294,111.887 68.326,116.967
  rectangle: 66.294,107.823 73.025,113.284
  rectangle: 60.96,100.457 73.025,106.807
  rectangle: 60.833,117.475 68.58,122.047
  rectangle: 60.833,107.569 65.024,122.047

## Silkscreen, mask and mechanical layers (free items; w line width, h text height)
Top Overlay:
  text "DUT 2016 U/I MEASURE MOD" at 62.23,94.742 h1.02
  text "PB5" at 88.519,79.502 h1.52 r90
  text "PB7" at 93.599,79.502 h1.52 r90
  text "ADC1256" at 73.152,77.597 h1.52 r90
  text "DAC8552" at 77.089,71.501 h1.52 r90
  text "PB4" at 88.519,69.342 h1.52 r90
  text "PB6" at 93.599,69.342 h1.52 r90
  text "LAUNCHPAD MOD DUT2016" at 80.264,59.182 h1.52
  text "LM5122 DUT2016" at 156.718,32.639 h1.52 r90
  text "DUT 2016  TPS28225" at 61.976,31.75 h1.02
  text "UCC27211 DUT 2016" at 95.885,31.115 h1.02 r30
Top Solder:
  region: 111.125,95.377 111.125,99.695 107.823,99.695 107.823,95.377
  region: 107.569,96.139 107.569,99.187 106.045,99.187 106.045,96.139
  rectangle: 66.294,103.632 70.993,106.807
  rectangle: 66.294,107.95 70.993,109.728
  region: 106.299,117.221 106.299,121.539 102.997,121.539 102.997,117.221
  region: 108.077,117.983 108.077,120.777 106.553,120.777 106.553,117.983
  region: 107.569,106.045 107.569,109.093 106.045,109.093 106.045,106.045
  region: 111.125,105.283 111.125,109.601 107.823,109.601 107.823,105.283
  rectangle: 119.71,76.302 124.435,83.566
  rectangle: 124.993,76.352 129.921,83.515
  rectangle: 126.797,54.381 128.778,56.032
  rectangle: 139.446,83.185 143.764,98.781
  rectangle: 134.112,83.337 138.684,98.781
  rectangle: 133.477,59.157 141.224,71.476
  rectangle: 124.079,59.284 129.159,71.349
  rectangle: 119.126,71.857 122.936,74.27
  rectangle: 119.126,69.19 122.936,71.349
  rectangle: 122.047,59.284 129.159,71.349
  rectangle: 133.477,59.157 143.891,71.476
  rectangle: 134.112,98.781 138.684,116.18
  rectangle: 139.446,98.781 143.764,116.18
  rectangle: 137.795,52.045 139.446,54.712
  rectangle: 141.605,52.045 146.99,54.839